# Altium PCB PCB1.pcbdoc (part 3 of 3)
Units mil, origin at the board's own origin, x right, y up, seen from the top; angles counter-clockwise.
Board outline 3947.03 x 3946.03 mil, 2 copper layers (Top Layer, Bottom Layer); 96 components, 119 nets, 489 pads, 175 vias.
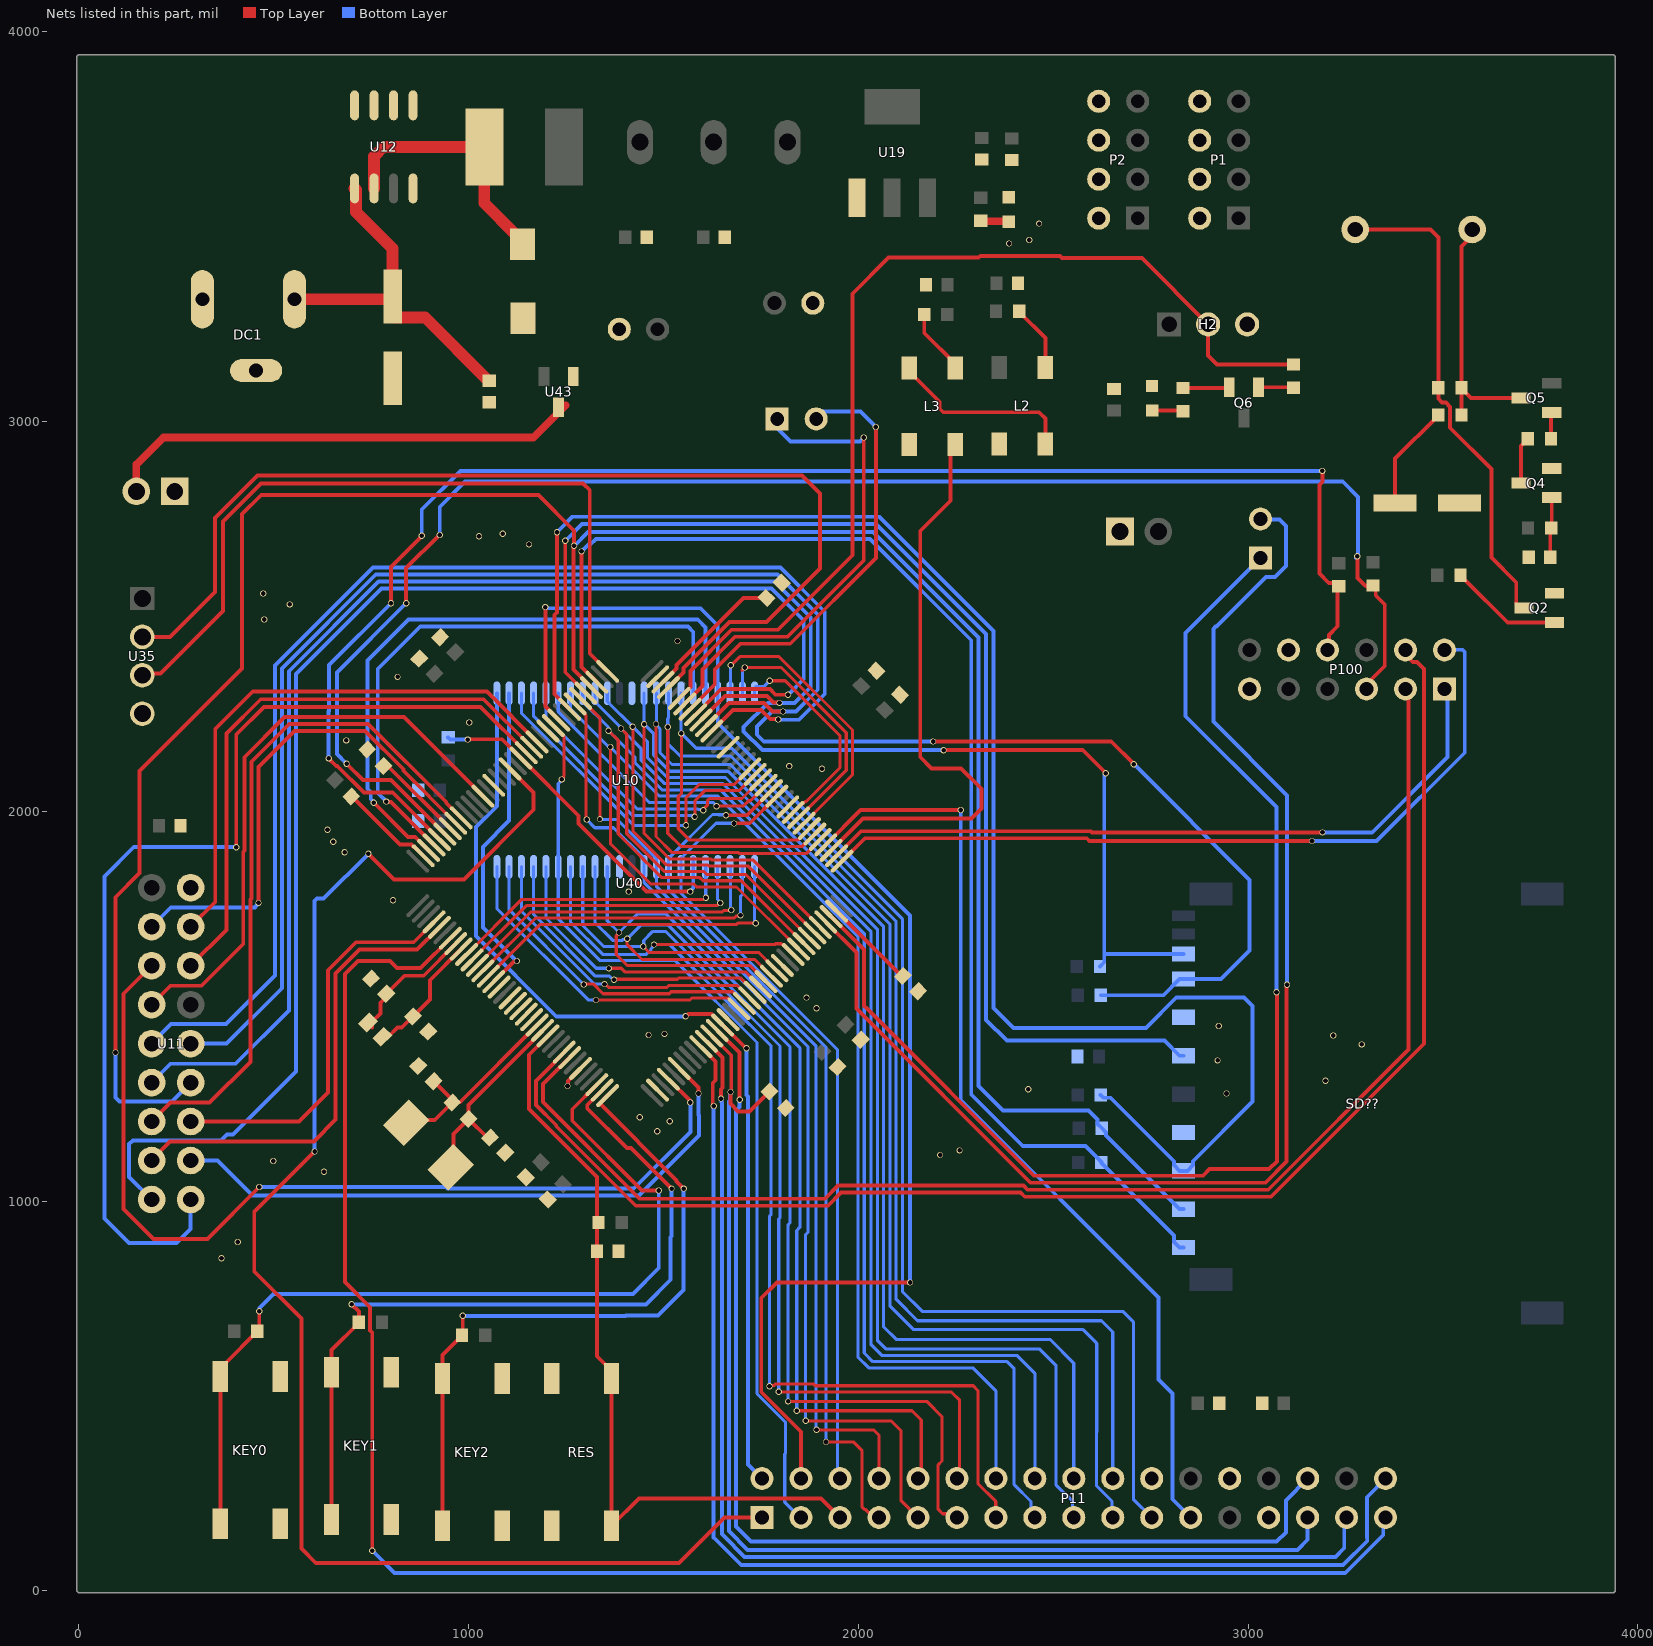
[diagram p2: the nets of this part, all layers, seen from the top]

## Via types
v1: diameter 16, hole 12, Top Layer to Bottom Layer, 175 vias

## Nets (pads, with @x,y where several pads share a name; then routed paths per layer and width w, separated by ;. In a path a pad name is that pad's centre, name@x,y a point inside that pad or via, vN(x,y) a via of type N, cw(c..) or ccw(c..) an arc to the next point about the centre after c; other vN are vias at no path point) (continued)
DCMI_D1: U11.9 U40.97 | length 3307.2
  Top Layer w10: U40.97@1624.19,2206.14 1678.05,2260 1750.8,2260 1774.12,2236.68 1793.32,2236.68 v1(1794.47,2235.53)
  Bottom Layer w10: U11.9@187,1404 237,1454 378,1454 503,1579 503,2374.46 754.54,2626 1800,2626 1914,2512 1914,2301 1848,2235 1795,2235 v1(1794.47,2235.53)
DCMI_D2: R104.1 SD??.7 U11.10 U40.98 | length 5299.4
  Top Layer w10: U40.98@1610.26,2220.06 1668.21,2278 1758.26,2278 1779.73,2256.53 1806.47,2256.53 v1(1807,2256) ; v1(2192,2179) 2649,2179 v1(2707,2121)
  Bottom Layer w10: U11.10@287,1404 379,1404 521,1546 521,2367 762,2608 1792.54,2608 1896,2504.54 1896,2311.97 1840.03,2256 v1(1807,2256) 1806.47,2256.53 1778.53,2256.53 1740,2218 1740,2196.46 1757.46,2179 v1(2192,2179) ; R104.1@2622.32,1528 2783.03,1528 2824.72,1569.69 SD??.7@2834.57,1569.69 2930.69,1569.69 3004,1643 3004,1824 v1(2707,2121)
DCMI_D3: R103.1 SD??.8 U11.11 U40.99 | length 5090.2
  Top Layer w10: U40.99@1596.35,2233.97 1658.37,2296 1765.71,2296 1782.35,2279.36 1796.76,2279.36 v1(1797.91,2278.21) ; v1(2219,2157) 2576,2157 v1(2635,2098)
  Bottom Layer w10: U11.11@187,1304 235.43,1352.43 402.43,1352.43 539,1489 539,2359.54 769.46,2590 1785.09,2590 1878,2497.09 1878,2319.42 1836.79,2278.21 v1(1797.91,2278.21) 1768.21,2278.21 1706,2216 1706,2205 1754,2157 v1(2219,2157) ; R103.1@2620.32,1602 2631.2,1612.88 2631.2,1631 ; v1(2635,2098) 2635,2096.38 2631.2,2092.57 2631.2,1631 ; SD??.8@2834.57,1633.86 2634.06,1633.86 2631.2,1631
DCMI_D4: R105.1 SD??.1 U11.12 U40.112 | length 6166.3
  Top Layer w10: v1(94,1381.15) 94,1779.49 156,1841.49 156,2104 419,2367 419,2763 468,2812 1179,2812 1271,2720 v1@1271,2681 ; v1(1270.68,2681.24) 1269.53,2680.09 1269.53,2676.23 1269,2675.7 1269,2363.66 U40.112@1315.17,2317.49
  Bottom Layer w10: v1(94,1381.15) 94,1266 104.43,1255.57 238.57,1255.57 U11.12@287,1304 ; v1(1270.68,2681.24) 1271.24,2681.24 1307,2717 2037.46,2717 2308,2446.46 2308,1295 2371,1232 2591.14,1232 2597,1226.14 2613.78,1209.36 2613.78,1197.88 R105.1@2624.66,1187 2635.54,1176.12 2635.54,1168.32 2824.72,979.13 SD??.1@2834.57,979.13
DCMI_D5: U11.13 U40.136 | length 1766.6
  Top Layer w10: U11.13@187,1204 235.43,1252.43 335.43,1252.43 440,1357 440,1773.74 443,1776.74 443,2127.11 539.89,2224 742.17,2224 942.66,2023.51 942.66,2021.87 U40.136@981.1,1983.43
DCMI_D6: U11.14 U40.4 | length 1020.6
  Top Layer w10: U11.14@287,1204 565,1204 639.2,1278.2 639.2,1592.2 711,1664 859.34,1664 U40.4@911.51,1716.17
DCMI_D7: U11.15 U40.5 | length 1207.1
  Top Layer w10: U11.15@187,1104 187,1106 234,1153 603,1153 659,1209 659,1584 720,1645 868.17,1645 U40.5@925.42,1702.25
DCMI_HREF: U11.5 U40.40 | length 2415.2
  Top Layer w10: U11.5@187,1604 115,1532 115,979.98 191.98,903 330,903 v1(463,1036) ; U40.40@1512.83,1312.51 1569,1256.34 v1(1569,1252.67)
  Bottom Layer w10: v1(463,1036) 942.26,1036 946.26,1032 1423.89,1032 1569,1177.11 v1(1569,1252.67)
DCMI_PCLK: U11.16 U40.42 | length 1598.3
  Top Layer w10: U40.42@1540.67,1340.35 1590,1291.02 v1(1590,1276)
  Bottom Layer w10: U11.16@287,1104 356,1104 446,1014 1437,1014 1591,1168 1591,1219.61 1590,1220.61 v1(1590,1276)
DCMI_PWDN: U11.18 U40.124 | length 2696.4
  Top Layer w10: v1(404,1908) 404,2197.15 474.85,2268 1030.59,2268 U40.124@1148.13,2150.46
  Bottom Layer w10: U11.18@287,1004 287,928 251,892 129,892 66,955 66,1833 141,1908 v1(404,1908)
DCMI_RESET: U11.7 U40.132 | length 1518.2
  Top Layer w10: U11.7@187,1504 235.43,1552.43 314.43,1552.43 422,1660 422,1896.3 425,1899.3 425,2138.81 528.19,2242 833.88,2242 U40.132@1036.78,2039.1
DCMI_SCL: U11.4 U40.122 | length 1452.5
  Top Layer w10: U11.4@287,1704 350,1767 350,2211 446.37,2307.37 1046.9,2307.37 U40.122@1175.97,2178.3
DCMI_SDA: U11.6 U40.123 | length 1504.6
  Top Layer w10: U11.6@287,1604 379,1696 379,2200 466.69,2287.69 1038.75,2287.69 U40.123@1162.06,2164.38
DCMI_VSYNC: U11.3 U40.137 | length 1294.6
  Top Layer w10: v1(461,1765.04) 461,2114 553,2206 734.71,2206 832.63,2108.08 832.63,2104.06 U40.137@967.19,1969.51
  Bottom Layer w10: U11.3@187,1704 236,1753 452,1753 452,1754.42 461,1763.42 v1(461,1765.04)
DCMI_XCLK: U11.17 U40.100 | length 3597.5
  Top Layer w10: U40.100@1582.43,2247.9 1648.53,2314 1773.17,2314 1787.96,2299.21 v1(1819.84,2299.21)
  Bottom Layer w10: U11.17@187,1004 129,1062 129,1146 138.57,1155.57 364.57,1155.57 380,1171 396,1171 406,1181 557,1332 557,2352.09 776.91,2572 1777.63,2572 1860,2489.63 1860,2339.1 1821.93,2301.04 1821.66,2301.04 v1(1819.84,2299.21)
FSMC_A0: U10.5 U40.10 | length 754.3
  Top Layer w8: U40.10@995.03,1632.65 1136.37,1774 1602.84,1774 1606.84,1778 v1(1609,1778)
  Bottom Layer w8: U10.5@1607.98,1857.68 1608.49,1857.17 1608.49,1778.51 v1(1609,1778)
FSMC_A1: U10.4 U40.11 | length 793.2
  Top Layer w8: U40.11@1008.94,1618.74 1148.21,1758 1637.31,1758 1644.31,1765 v1(1646,1765)
  Bottom Layer w8: U10.4@1639.48,1857.68 1639.24,1857.44 1639.24,1773.92 1646,1767.16 v1(1646,1765)
FSMC_A2: U10.3 U40.12 | length 822
  Top Layer w8: U40.12@1022.86,1604.81 1160.05,1742 1651.28,1742 1654.75,1745.47 1672.47,1745.47 v1(1674,1747)
  Bottom Layer w8: U10.3@1670.98,1857.68 1672.49,1856.17 1672.49,1748.51 v1(1674,1747)
FSMC_A3: U10.2 U40.13 | length 846.6
  Top Layer w8: U40.13@1036.78,1590.9 1171.88,1726 1681.28,1726 1686.75,1731.47 1696.47,1731.47 v1(1698,1733)
  Bottom Layer w8: v1(1698,1733) 1698,1782 1702.47,1786.47 U10.2@1702.47,1857.68
FSMC_A4: U10.1 U40.14 | length 888.6
  Top Layer w8: U40.14@1050.7,1576.97 1183.73,1710 1687.91,1710 1690.91,1713 v1(1737,1713)
  Bottom Layer w8: U10.1@1733.97,1857.68 1733.97,1718.19 1737,1715.16 v1(1737,1713)
FSMC_A5: U10.24 U40.15 | length 832.7
  Top Layer w10: U40.15@1064.62,1563.06 1116.41,1614.85 1122.85,1614.85 v1(1124,1616)
  Bottom Layer w10: U10.24@1104.05,2303 1104.05,1976.05 1037,1909 1037,1702 1123,1616 v1(1124,1616)
FSMC_A6: P11.2 U10.23 U40.50 | length 2584.3
  Top Layer w10: v1(1557,1474) 1558.62,1474 1564.86,1480.23 1623.22,1480.23 1651.75,1451.7 U40.50@1652.03,1451.7 1711.66,1392.07 v1(1713.1,1392.07)
  Bottom Layer w10: U10.23@1072.55,2303 1072.55,2012.93 1019,1959.38 1019,1680 1225,1474 v1(1557,1474) ; v1(1713.1,1392.07) 1713.1,1272.6 1717,1268.7 1717,324 P11.2@1753,288
FSMC_A7: U10.22 U40.53 | length 838.9
  Top Layer w8: v1(1327,1516) 1568.16,1516 1573.16,1520.99 1665.43,1520.99 1692.96,1493.46 U40.53@1693.78,1493.46
  Bottom Layer w8: U10.22@1072.55,1857.68 1072.55,1750.63 1307,1516.18 1326.82,1516.18 v1(1327,1516)
FSMC_A8: U10.21 U40.54 | length 818.9
  Top Layer w8: v1(1295.76,1555.7) 1297.3,1557.23 1311.64,1557.23 1311.76,1557.35 1319.76,1557.35 1345.12,1532 1515.18,1532 1520.18,1536.99 1677.27,1536.99 1706.89,1507.38 U40.54@1707.7,1507.38
  Bottom Layer w8: U10.21@1104.05,1857.68 1104.05,1747.41 v1(1295.76,1555.7)
FSMC_A9: U10.20 U40.55 | length 796
  Top Layer w8: v1(1348.7,1556.7) 1350.87,1556.7 1359.57,1548 1508.56,1548 1513.55,1552.99 1689.1,1552.99 1720.8,1521.3 U40.55@1721.62,1521.3
  Bottom Layer w8: U10.20@1135.54,1857.68 1135.54,1744.21 1323.04,1556.7 v1(1348.7,1556.7)
FSMC_A10: U10.19 U40.56 | length 777.1
  Top Layer w8: v1(1373,1568) 1373.99,1568.99 1535.96,1568.99 1538.96,1572 1698.76,1572 U40.56@1735.54,1535.22
  Bottom Layer w8: U10.19@1167.04,1857.68 1167.04,1735.33 1325.37,1577 1361.84,1577 1370.84,1568 v1(1373,1568)
FSMC_A11: U10.18 U40.57 | length 755.9
  Top Layer w8: v1(1360.05,1597) 1360.44,1597.38 1391.68,1597.38 1401.06,1588 1710.59,1588 U40.57@1749.46,1549.13
  Bottom Layer w8: U10.18@1198.54,1857.68 1198.54,1726.46 1327.62,1597.38 1359.67,1597.38 v1(1360.05,1597)
FSMC_A12: U10.28 U40.87 | length 704.1
  Top Layer w8: v1(1636,2013) 1637.15,2014.15 1705.64,2014.15 1718.61,2027.13 1723.57,2027.13 U40.87@1763.38,2066.94
  Bottom Layer w8: U10.28@1230.03,2303 1230.03,2255.97 1463,2023 1627.31,2023 1636,2014.31 v1(1636,2013)
FSMC_A13: U10.27 U40.88 | length 752.2
  Top Layer w8: v1(1602,2003) 1602,2005.16 1613.46,2016.62 1613.46,2028.31 1618.14,2032.99 1627.71,2032.99 1701.59,2033 U40.88@1749.46,2080.87
  Bottom Layer w8: U10.27@1198.54,2303 1198.54,2240.46 1433,2006 1588.28,2006 1589.75,2004.53 1600.47,2004.53 v1(1602,2003)
FSMC_A14: U10.26 U40.89 | length 803.4
  Top Layer w8: v1(1580,1986) 1581,1987 1581,2027.55 1606.45,2053 1693.76,2053 U40.89@1735.54,2094.78
  Bottom Layer w8: U10.26@1167.04,2303 1167.04,2243.59 1421.63,1989 1572.08,1989 1573.55,1987.53 1578.47,1987.53 v1(1580,1986)
FSMC_A15: U10.25 U40.90 | length 857.6
  Top Layer w8: v1(1558,1964) 1558,2035 1592,2069 1681.92,2069 U40.90@1721.62,2108.7
  Bottom Layer w8: U10.25@1135.54,2303 1135.54,2252.46 1424,1964 v1(1558,1964)
FSMC_A16: U10.42 U40.80 | length 762.5
  Top Layer w8: v1(1673,2375) 1674.04,2375 1696.04,2397 1796.63,2397 1985,2208.63 1985,2093.7 U40.80@1860.81,1969.51
  Bottom Layer w8: U10.42@1670.98,2303 1671.99,2304.01 1671.99,2373.99 v1(1673,2375)
FSMC_A17: U10.43 U40.81 | length 676.9
  Top Layer w8: 1702,2362 v1(1709,2369) 1802,2369 1969,2202 1969,2105.53 U40.81@1846.9,1983.43
  Bottom Layer w8: U10.43@1702.47,2303 1702.47,2360.31 1709,2366.84 v1(1709,2369)
FSMC_A18: U10.44 U40.82 | length 548.1
  Top Layer w8: v1(1773,2335) 1812.33,2335 1953,2194.33 1953,2112.16 1865.72,2024.88 1863.59,2024.88 1860.57,2021.87 1857.49,2021.87 U40.82@1832.97,1997.35
  Bottom Layer w8: U10.44@1733.97,2303 1733.97,2316.26 1738.42,2320.71 1758.71,2320.71 v1(1773,2335)
FSMC_D0: P11.6 U10.7 U40.85 | length 2070.6
  Top Layer w10: v1(1681,1969) 1681.35,1969.35 1721.46,1969.35 U40.85@1791.22,2039.1
  Bottom Layer w8: v1(1681,1969) 1680.65,1969.35 1634.94,1969.35 1544.99,1879.39 U10.7@1544.99,1857.68 1544.99,1789.73 1947,1387.72 P11.6@1947,288
FSMC_D1: P11.7 U10.8 U40.86 | length 2303.1
  Top Layer w8: v1(1917,382) 1987,382 2010,359 2010,214.69 2015.66,209.03 2018.16,209.03 2039.18,188 P11.7@2053,188
  Top Layer w10: v1(1660.66,1989.66) 1661,1990 1714.27,1990 U40.86@1777.3,2053.03
  Bottom Layer w8: v1(1660.66,1989.66) 1659.13,1991.19 1641.64,1991.19 1640.84,1992 1626.11,1992 1513.5,1879.39 U10.8@1513.5,1857.68 1513.5,1798.59 1917,1395.09 v1(1917,382)
FSMC_D2: P11.8 U10.9 U40.114 | length 2428.6
  Top Layer w8: U40.114@1287.33,2289.65 1337,2239.98 v1(1337,1980) ; v1(1893,413) 2039,413 2053,399 P11.8@2053,288
  Bottom Layer w8: v1@1338.09,1979 1382,1979 1482,1879 U10.9@1482,1857.68 1482,1807.46 1892,1397.46 1892,414 v1(1893,413)
FSMC_D3: P11.9 U10.10 U40.115 | length 2613.3
  Top Layer w8: U40.115@1273.41,2275.74 1273.41,2274.92 1301,2247.33 1301,1981 v1(1303,1979) ; v1(1865,436) 2084,436 2110,410 2110,231 P11.9@2153,188
  Bottom Layer w8: v1(1303,1979) 1324,1958 1371.89,1958 1450.5,1879.39 U10.10@1450.5,1857.68 1450.5,1816.33 1870.85,1395.98 1870.85,920 1865,914.15 v1(1865,436)
FSMC_D4: P11.10 U10.13 U40.58 | length 2697.6
  Top Layer w8: v1(1386,1689) 1386,1687.31 1379,1680.31 1379,1632.69 1407.69,1604 1722.44,1604 U40.58@1763.38,1563.06 ; v1(1842,462) 2138,462 2161.69,438.31 2161.69,296.69 P11.10@2153,288
  Bottom Layer w8: U10.13@1356.02,1857.68 1356.02,1718.98 v1(1386,1689) 1434,1737 1506,1737 1850,1393 1850,932.58 1842,924.58 v1(1842,462)
FSMC_D5: P11.11 U10.14 U40.59 | length 2848.2
  Top Layer w8: v1(1407,1673) 1407,1658 1445,1620 1734.27,1620 U40.59@1777.3,1576.97 ; v1(1820,486) 2176,486 2215,447 2215,333 2205,323 2205,209 2216.23,197.77 2243.23,197.77 P11.11@2253,188
  Bottom Layer w8: U10.14@1324.52,1857.68 1324.52,1714.48 1370,1669 1394.28,1669 1396.75,1671.47 1405.47,1671.47 v1(1407,1673) 1442,1708 1512.37,1708 1824.64,1395.73 1824.64,944.27 1820,939.63 v1(1820,486)
FSMC_D6: P11.12 U10.15 U40.60 | length 2759.5
  Top Layer w8: v1(1448,1653) 1463,1638 1744.12,1638 U40.60@1791.22,1590.9 ; v1(1796,511) 1797,510 2239,510 2260,489 2260,295 P11.12@2253,288
  Bottom Layer w8: U10.15@1293.02,1857.68 1293.02,1706.98 1347,1653 v1(1448,1653) 1449.53,1654.53 1449.53,1668.53 1473,1692 1505.25,1692 1685,1512.25 1685,1512 1799,1398 1799,957.08 1796,954.08 v1(1796,511)
FSMC_D7: P11.13 U10.16 U40.63 | length 2945.7
  Top Layer w8: v1(1476,1658) 1785.68,1658 1787.86,1660.19 1802.37,1660.19 1804.46,1658.1 1806.7,1658.1 1832.16,1632.65 U40.63@1832.97,1632.65 ; v1(1772,525) 1773.53,526.53 1783.25,526.53 1787.72,531 1884.8,531 1889.8,526 2295,526 2307,514 2307,275.27 2352.74,229.53 2352.74,188.26 P11.13@2353,188
  Bottom Layer w8: U10.16@1261.53,1857.68 1261.53,1715.84 1344.37,1633 1456.28,1633 1468,1644.72 1468,1647.84 1476,1655.84 v1(1476,1658) 1516.63,1658 1669,1505.63 1669,1505.37 1776,1398.37 1776,964.77 1772,960.77 v1(1772,525)
FSMC_D8: P11.14 U10.29 U40.64 | length 3556.4
  Top Layer w8: v1(1364,2165) 1364,1917.2 1370,1911.2 1370,1911 1467,1814 1577.28,1814 1585.28,1806 1687.47,1806 U40.64@1846.9,1646.57
  Bottom Layer w8: U10.29@1261.53,2303 1261.53,2263.47 1358.47,2166.53 1362.47,2166.53 v1(1364,2165) 1411.26,2117.74 1411.26,2117.6 1489.86,2039 1639.61,2039 1999.06,1679.55 1999.06,600 2027.06,572 2294,572 2353,513 P11.14@2353,288
FSMC_D9: P11.15 U10.30 U40.65 | length 3752.2
  Top Layer w8: v1@1360,2205 1361,2205 1384,2182 1384,1941.75 1495.75,1830 1593.52,1830 1601.52,1822 1699.3,1822 U40.65@1860.81,1660.49
  Bottom Layer w8: U10.30@1293.02,2303 1293.02,2281.29 1359,2215.31 v1(1359,2207) 1427.26,2138.74 1427.26,2124.23 1496.49,2055 1646.24,2055 2015.32,1685.91 2015.32,610 2037.32,588 2382,588 2400,570 2400,272.41 2443.23,229.18 2443.23,197.77 P11.15@2453,188
FSMC_D10: P11.16 U10.31 U40.66 | length 3629.4
  Top Layer w8: v1(1391,2212.4) 1406,2197.4 1406,1942.37 1502.37,1846 1602.76,1846 1610.76,1838 1711.15,1838 U40.66@1874.74,1674.41
  Bottom Layer w8: U10.31@1324.52,2303 1324.52,2281.29 1391,2214.81 v1(1391,2212.4) 1443.26,2160.14 1443.26,2130.86 1503.12,2071 1652.86,2071 2033,1690.86 2033,631 2060,604 2407,604 2453,558 P11.16@2453,288
FSMC_D11: P11.17 U10.32 U40.67 | length 3772.4
  Top Layer w8: v1(1421,2217) 1422,2216 1422,1949 1509,1862 1614.6,1862 1617.18,1859.42 1717.56,1859.42 U40.67@1888.65,1688.33
  Bottom Layer w8: U10.32@1356.02,2303 1356.02,2281.98 v1(1421,2217) 1459.26,2178.74 1459.26,2137.48 1509.75,2087 1659.49,2087 2049,1697.49 2049,643 2072,620 2466,620 2507,579 2507,272.41 2549.88,229.53 2549.88,191.12 P11.17@2553,188
FSMC_D12: P11.18 U10.35 U40.68 | length 3623
  Top Layer w8: v1(1450.5,2223.5) 1450.5,1943.13 1515.63,1878 1621.23,1878 1623.8,1875.42 1729.4,1875.42 U40.68@1902.58,1702.25
  Bottom Layer w8: U10.35@1450.5,2303 v1(1450.5,2223.5) 1475.26,2198.74 1475.26,2144.11 1516.37,2103 1666.12,2103 2065,1704.12 2065,677 2097,645 2492,645 2553,584 P11.18@2553,288
FSMC_D13: P11.19 U10.36 U40.77 | length 3687.4
  Top Layer w8: v1(1481,2224) 1481,1935.25 1522.25,1894 1692.97,1894 1695.54,1891.42 1866.25,1891.42 U40.77@1902.58,1927.75
  Bottom Layer w8: U10.36@1482,2303 1482,2225 v1(1481,2224) 1481,2221.84 1491.26,2211.57 1491.26,2150.74 1522,2120 1671.75,2120 2081,1710.75 2081,731 2142,670 2577,670 2612,635 2612,407.22 2611.47,406.69 2611.47,268.91 2650.85,229.53 2650.85,190.15 P11.19@2653,188
FSMC_D14: P11.20 U10.37 U40.78 | length 3518.2
  Top Layer w8: v1(1511.26,2216.3) 1511.25,1943.75 1545,1910 1856.16,1910 1887.83,1941.67 U40.78@1888.65,1941.67
  Bottom Layer w8: U10.37@1513.5,2303 1513.5,2240.3 1511.26,2238.06 v1(1511.26,2216.3) 1511.26,2173.74 1543,2142 1672.37,2142 2097,1717.37 2097,748 2152,693 2624,693 2653,664 P11.20@2653,288
FSMC_D15: P11.21 U10.38 U40.79 | length 3579.3
  Top Layer w8: v1(1546,2200) 1546,2045.63 1538,2037.63 1538,1955.72 1567.72,1926 1844.33,1926 1873.92,1955.59 U40.79@1874.74,1955.59
  Bottom Layer w8: U10.38@1544.99,2303 1545.49,2302.49 1545.49,2200.51 v1(1546,2200) 1584,2162 1675,2162 2113,1724 2113,768 2164,717 2679,717 2706,690 2706,235 P11.21@2753,188
FSMC_NBL0: U10.39 U40.141 | length 1535.4
  Top Layer w10: v1(789,2025) 790.15,2023.85 801.49,2023.85 U40.141@911.51,1913.83
  Bottom Layer w10: v1(789,2025) 767,2047 767,2365 876,2474 1563,2474 1576.49,2460.51 U10.39@1576.49,2303
FSMC_NBL1: U10.40 U40.142 | length 1650.6
  Top Layer w10: v1(757,2022) 845.12,1933.88 863.34,1933.88 897.31,1899.91 U40.142@897.59,1899.91
  Bottom Layer w10: v1(757,2022) 757,2023.62 749,2031.62 749,2050 741,2058 741,2387 846,2492 1588,2492 1607.98,2472.02 U10.40@1607.98,2303
FSMC_NE3: R100.2 U10.6 U40.125 | length 892.3
  Top Layer w10: v1@999,2181 1003,2185 1085.76,2185 U40.125@1134.22,2136.54 1282,1988.76 1282,1969 1457,1794 v1(1569,1794)
  Bottom Layer w10: R100.2@946.87,2189.66 R100.2@948,2189.66 953.66,2184 v1(997.9,2184) v1@1002,2184 ; v1(1569,1794) 1569,1795.62 1576.49,1803.11 U10.6@1576.49,1857.68 U10.6@1576.49,1880.49
FSMC_NE4: P11.1 U40.127 | length 3870.4
  Top Layer w10: v1(605,1127) 450,972 450,820 571,699 571,108 608,71 1540,71 1657,188 P11.1@1753,188 ; v1(743,1891) 809,1825 988,1825 1167,2004 1167,2048.08 U40.127@1106.38,2108.7
  Bottom Layer w10: v1@603,1123 605,1125 v1(605,1127) 605,1770.14 610.86,1776 628,1776 v1(743,1891)
FSMC_NOE: P11.4 U10.41 U40.118 | length 3561.3
  Top Layer w10: v1(1197,2524) 1197,2268.63 U40.118@1231.65,2233.97 ; P11.4@1853,288 1853,408 1751,510 1751,751 1791,791 v1(2133,791)
  Bottom Layer w10: v1@1196,2524 1199,2521 1595,2521 1639.48,2476.52 U10.41@1639.48,2303 1639.48,2226.52 2133,1733 v1(2133,791)
FSMC_NWE: P11.3 U10.17 U40.119 | length 2422.9
  Top Layer w8: U40.119@1217.74,2220.06 1217.74,2219.24 1245.27,2191.71 1245.27,2090.43 1239,2084.16 v1(1239,2082)
  Bottom Layer w8: v1(1239,2082) 1239,2079.84 1230.03,2070.87 U10.17@1230.03,1857.68 1230.03,1724.72 1337.75,1617 1530,1617 1740,1407 1740,506 1813,433 1813,352.66 1811.47,351.14 1811.47,227.53 1851,188 P11.3@1853,188
GND: C1.1 C2.1 C13.1 C17.2 C21.1 C23.1 C25.1 C26.1 C27.1 C29.2 C30.2 C31.2 C37.2 C38.2 C39.2 C40.2 C41.2 C100.1 C101.1 C102.1 C103.1 C106.2 C107.2 D3.2 DC1.2 DC1.3 GSM.1 H2.3 KEY0.1 KEY0.2 KEY1.1 KEY1.2 KEY2.1 KEY2.2 L2.3 L3.3 LED1.1 LED2.1 P1.2 P1.4 P1.6 P1.8 P2.2 P2.4 P2.6 P2.8 P11.22 P11.26 P11.27 P100.10 P100.11 Q2.2 Q4.2 R13.2 R14.2 RES.3 RES.4 SD??.3 SD??.6 U10.12 U10.34 U11.2 U12.4 U12.5 U12.6 U12.7 U12.8 U19.1 U20.2 U21.2 U27.2 U28.2 U29.2 U35.4 U36.2 U37.2 U38.1 U39.1 U40.16 U40.31 U40.38 U40.51 U40.61 U40.83 U40.94 U40.107 U40.120 U40.130 U42.1 U43.1 U44.2 VBUS.1 | length 59
  Top Layer w10: v1(1254,1295.15) 1255.15,1296.3 1255.15,1307.89 1287.33,1340.07 U40.31@1287.33,1340.35
  other v1: 366,853 408,895 629,1075 499,1103 2210,1118 2260,1130 1484,1179 1516,1205 1439,1215 2945,1276 2436,1287 3199,1309 2922,1361 3292,1402 3219,1425 1462,1426 1503,1429 2925,1449 1893,1495 1867,1522 806,1772 1411,1794 682,1895 653,1922 638,1953 1907,2109 1823,2116 686,2182 1002,2228 818,2345 1536,2437 476,2492 541,2531 473,2559 1155,2685 1027,2706 1088,2712 2387,3457 2439,3466 2464,3508
IIC_SCL: P100.5 R110.1 U40.139 | length 4065.2
  Top Layer w10: v1(687.07,2122.07) 729.14,2079.99 801.02,2079.99 U40.139@939.35,1941.67 ; v1(840,2534) 840,2624 v1@925,2709 ; v1(3280.48,2654.77) 3280.48,2598.99 3300.13,2579.34 3302.66,2579.34 ; P100.5@3306,2328 3351,2373 3351,2531 3327.68,2554.32 3327.68,2568.46 3325.41,2570.74 3311.26,2570.74 3302.66,2579.34 ; R110.1@3321,2579.34 3302.66,2579.34
  Bottom Layer w10: v1(687.07,2122.07) 662.08,2147.05 662.08,2356.08 v1(840,2534) ; v1(926,2709) 926,2781 991,2846 3243,2846 3282,2807 v1@3282,2655 ; v1@3277,2650 3280.48,2653.48 v1(3280.48,2654.77)
IIC_SDA: P100.8 R111.1 U40.140 | length 3954.8
  Top Layer w10: v1(641,2135.82) 660.59,2116.23 663.21,2116.23 731.44,2048 805.45,2048 925.42,1928.03 U40.140@925.42,1927.75 ; v1(801,2534) 801,2627 v1@883,2709 ; v1(3190.5,2873.58) 3191,2873.08 3191,2845.58 3183,2837.58 3183,2610 3207.28,2585.72 3220.99,2585.72 3223.76,2582.95 3224.2,2582.95 3234.57,2572.57 3230,2568 3230,2475 3207.67,2452.67 3207.67,2432.67 P100.8@3203,2428
  Bottom Layer w10: v1(641,2135.82) 641,2256.25 641.97,2257.22 641.97,2374.97 v1(801,2534) ; v1(880,2707) 880,2774 979.58,2873.58 v1(3190.5,2873.58)
KEY0: KEY0.3 KEY0.4 R17.1 U40.34 | length 2275.9
  Top Layer w10: KEY0.4@363.22,171.91 KEY0.3@363.22,549.86 377.91,564.55 377.91,585.12 457.66,664.87 R17.1@457.66,666 463,671.34 v1(463,717) ; U40.34@1329.09,1298.59 1266,1235.5 1266,1206 1445,1027 v1(1488,1027)
  Bottom Layer w10: v1(463,717) 464,718 464,726 500,762 1422,762 1488,828 v1(1488,1027)
KEY1: KEY1.3 KEY1.4 R18.1 U40.35 | length 2032.5
  Top Layer w10: KEY1.4@648.45,183.05 KEY1.3@648.45,561 648.45,617.64 718.68,687.87 R18.1@718.68,689 718.68,716.32 v1(700,735) ; U40.35@1343.01,1284.67 1304.56,1246.22 1304.56,1237.94 1406.62,1135.88 1417.12,1135.88 v1(1521,1032)
  Bottom Layer w10: v1(700,735) 1455,735 1518,798 1518,906.69 1521,909.69 v1(1521,1032)
KEY2: KEY2.3 KEY2.4 R19.1 U40.36 | length 1751.9
  Top Layer w10: KEY2.4@933.22,166.91 KEY2.3@933.22,544.86 933.22,604.75 983.34,654.87 R19.1@983.34,656 985,657.66 v1(985,706) ; U40.36@1356.93,1270.75 1336.86,1250.68 1336.86,1250.01 1533.63,1053.23 1533.63,1050.37 v1(1552,1032)
  Bottom Layer w10: v1(985,706) 986,705 1403,705 1404,706 1486,706 1552,772 v1(1552,1032)
LCD_BL: P11.23 U40.76 | length 2443.6
  Top Layer w10: U40.76@1916.49,1913.83 2006.22,2003.56 v1(2263,2003.56)
  Bottom Layer w10: v1(2263,2003.56) 2263,1260 2770,753 2770,542 2806,506 2806,235 P11.23@2853,188
NetBUZZER2_1: BUZZER2.1 Q5.3 R20.2 R21.2 | length 649.4
  Top Layer w10: R21.2@3547.66,3017 3547.66,3085.87 3572.65,3060.87 Q5.3@3700.56,3060.87 ; R20.2@3547.66,3087 3547.66,3449.18 3575.01,3476.53 BUZZER2.1@3575.01,3493
NetBUZZER2_2: BUZZER2.2 Q2.3 R20.1 | length 1275.4
  Top Layer w10: BUZZER2.2@3274.99,3493 3468,3493 3488.34,3472.66 R20.1@3488.34,3087 3488.34,3058.67 3497.98,3049.03 3507.58,3049.03 3518.78,3037.82 3518.78,2984.22 3625,2878 3625,2651 3688.39,2587.61 3688.39,2530.78 3697.17,2522 Q2.3@3708,2522
NetC17_1: C17.1 C21.2 DC1.1 U12.1 | length 932.4
  Top Layer w30: DC1.1@553.2,3314 C17.1@797.89,3314 ; U12.1@707.53,3598.37 711.34,3594.56 711.34,3537.66 805,3444 C17.1@805,3321.11 C17.1@797.89,3314 ; C21.2@1053,3104.56 1051.03,3104.56 888.37,3267.22 813.62,3267.22 797.89,3282.95 C17.1@797.89,3314
NetC29_1: C29.1 U40.71 | length 239.2
  Top Layer w10: U40.71@1944.33,1744.01 2032.61,1655.73 2032.94,1655.73 2111.18,1577.49 C29.1@2114.51,1577.49
NetC30_1: C30.1 U40.106 | length 361.8
  Top Layer w10: U40.106@1498.91,2331.41 1498.91,2331.69 1533.2,2365.98 1533.2,2375.11 1705.6,2547.51 1746.53,2547.51 1747.92,2548.9 1763.12,2548.9 C30.1@1764.51,2547.51
NetC40_1: C40.1 R21.1 | length 272.2
  Top Layer w10: C40.1@3377.32,2790.83 3377.32,2904.85 3488.34,3015.87 R21.1@3488.34,3017
NetD3_1: D3.1 L1.1 U12.2 | length 666
  Top Layer w30: U12.2@757.53,3598.37 757.53,3680.53 781.65,3704.65 L1.1@1040.52,3704.65 1040.52,3560.83 1121.42,3479.93 1121.74,3479.93 1138.63,3463.04 D3.1@1138.63,3454.65
NetL2_1: L2.1 R51.1 | length 171.5
  Top Layer w10: R51.1@2412.66,3283 2412.66,3281.87 2480.05,3214.48 L2.1@2480.05,3139.43
NetL2_4: L2.4 L3.2 | length 484.2
  Top Layer w10: L3.2@2130.9,3138 2130.9,3128.16 2209,3050.06 2209,3033 2218,3024 2464,3024 2480.05,3007.95 L2.4@2480.05,2942.57
NetL3_1: L3.1 R52.1 | length 170
  Top Layer w10: R52.1@2169.34,3275 2169.34,3227.5 2249,3147.84 L3.1@2249,3138
NetLED1_2: LED1.2 R23.1 | length 79.8
  Top Layer w10: LED1.2@2754.14,3028.53 2831.55,3028.53 R23.1@2833.24,3026.84
NetLED2_2: LED2.2 R24.1 | length 72.7
  Top Layer w20: R24.1@2314.55,3515.21 2315.89,3513.87 2384.79,3513.87 LED2.2@2386.14,3512.52
NetQ2_1: Q2.1 U5.1 | length 292.4
  Top Layer w10: U5.1@3545.28,2605.87 3545.28,2604.74 3556.15,2593.87 3557.28,2593.87 3666.55,2484.6 Q2.1@3786.74,2484.6
NetQ4_1: Q4.1 U41.1 U42.2 | length 154.6
  Top Layer w10: U42.2@3775.56,2652 3775.56,2724.9 U41.1@3777.66,2727 3779.3,2728.64 Q4.1@3779.3,2805.01
NetQ4_3: Q4.3 R22.1 | length 120.7
  Top Layer w10: Q4.3@3700.56,2842.41 3700.56,2937.21 3718.09,2954.74 R22.1@3718.09,2955.87
NetQ5_1: Q5.1 R22.2 | length 68.4
  Top Layer w10: R22.2@3777.41,2955.87 3777.41,3021.59 Q5.1@3779.3,3023.47
NetQ6_1: Q6.1 R50.1 | length 90.3
  Top Layer w10: Q6.1@3026.99,3088.04 3116.3,3088.04 R50.1@3117,3087.34
NetQ6_2: Q6.2 R23.2 | length 119.7
  Top Layer w10: R23.2@2833.24,3086.16 2950.31,3086.16 Q6.2@2952.19,3088.04
NetR12_1: R12.1 U40.143 | length 247.7
  Top Layer w10: R12.1@698.97,2038.03 700.97,2038.03 824.48,1914.52 853.47,1914.52 857.87,1910.13 859.53,1910.13 U40.143@883.67,1885.99
NetR13_1: R13.1 U40.138 | length 237.8
  Top Layer w10: R13.1@782.03,2116.25 792.6,2116.25 U40.138@953.26,1955.59
NetU38_2: U38.2 U40.8 X3.1 | length 333
  Top Layer w10: 752.94,1445.32 752.94,1460.52 773.58,1481.16 773.58,1508.9 788.73,1524.06 788.73,1531.73 835.24,1578.24 884.94,1578.24 U40.8@967.19,1660.49
NetU39_2: U39.2 U40.9 X3.2 | length 324.4
  Top Layer w10: X3.2@778.68,1421.58 793.88,1421.58 817.27,1444.96 828.56,1444.96 U39.2@857.32,1473.72 901,1517.4 901,1566.47 U40.9@981.1,1646.57
NetU43_3: U43.3 VBUS.2 | length 1233.1
  Top Layer w20: VBUS.2@147.58,2821 147.58,2889.58 217,2959 1166,2959 1249,3042
OSC_IN: R16.2 U36.1 U40.23 X2.2 | length 510.4
  Top Layer w10: X2.2@840.2,1200.92 847.16,1207.88 913.29,1207.88 R16.2@958.12,1252.71 ; U36.1@910.19,1307.71 965.19,1252.71 965.99,1253.51 977.78,1253.51 U40.23@1175.97,1451.7
OSC_OUT: R16.1 U37.1 U40.24 X2.1 | length 524.5
  Top Layer w10: X2.1@954.35,1086.78 961.31,1093.74 961.31,1172 R16.1@1000.07,1210.76 ; U37.1@1055.07,1162.83 1047.99,1162.83 R16.1@1000.07,1210.76 ; U40.24@1189.9,1437.78 1166.39,1414.28 1166.39,1413.61 1166.88,1413.12 1000.07,1246.3 1000.07,1227.74 1000.87,1226.94 1000.07,1226.14 R16.1@1000.07,1210.76
PF6: U40.18
PF7: U40.19
PF8: U40.20
PF9: U40.21
PF10: U40.22
RESET: C31.1 P11.5 R15.1 RES.1 RES.2 U40.25 | length 2000.2
  Top Layer w10: U40.25@1203.81,1423.86 1155.3,1375.36 1155.3,1236.24 1329.34,1062.2 1329.34,954 1329.52,953.82 C31.1@1329.52,871.13 1329.52,601.8 1366.77,564.55 RES.1@1366.77,544.86 RES.2@1366.77,166.91 1436.87,237 1904,237 P11.5@1953,188
RGB: L3.4 U40.75 | length 1511
  Top Layer w10: U40.75@1930.41,1899.91 2012.5,1982 2291,1982 2316,2007 2316,2058 2264,2110 2188,2110 2158.9,2139.1 2158.9,2718.9 2237,2797 2237,2929.15 L3.4@2249,2941.15
S_DOUT: P100.4 U40.28 | length 3767.4
  Top Layer w10: U40.28@1245.57,1382.1 1221.44,1357.97 1221.44,1356.31 1173.3,1308.18 1173.3,1246.24 1225,1194.54 1225,1192 1429,988 1922.23,988 1955.73,1021.5 2416.59,1021.5 2427.09,1011 3059.37,1011 3452,1403.63 3452,2365 3433.39,2383.61 3422.66,2383.61 3405.35,2400.92 P100.4@3405.35,2411.65
S_LRCK: P100.2 U40.73 | length 2038.3
  Top Layer w10: U40.73@1958.25,1872.07 2017.18,1931 2586.28,1931 2593.28,1924 v1(3164,1924)
  Bottom Layer w10: v1(3164,1924) 3330,1924 3556.27,2150.27 3556.27,2408.87 3550.42,2414.73 3529.55,2414.73 3525.66,2418.61 3505.16,2418.61 P100.2@3501.27,2414.73
S_SCLK: P100.1 U40.74 | length 1871.8
  Top Layer w10: U40.74@1944.33,1885.99 2007.34,1949 2596.86,1949 2599.86,1946 v1(3191,1946)
  Bottom Layer w10: v1(3191,1946) 3318.7,1946 3512,2139.3 P100.1@3512,2336
S_SDIN: P100.3 U40.29 | length 3537.3
  Top Layer w10: U40.29@1259.49,1368.19 1191.3,1300 1191.3,1253.7 1439,1006 1914.77,1006 1948.27,1039.5 2424.04,1039.5 2434.54,1029 3051.91,1029 3412,1389.09 P100.3@3412,2293
SDIO_CMD: R101.1 SD??.2 U40.116 | length 4226.4
  Top Layer w10: v1(1227,2716) 1227,2510.34 1221,2504.34 1221,2300.3 U40.116@1259.49,2261.81
  Bottom Layer w10: v1(1227,2716) 1267,2756 2053.61,2756 2347,2462.61 2347,1495 2398,1444 2738,1444 2816,1522 2990,1522 3012,1500 3012,1254.99 2859.09,1102.09 2859.09,1092.25 2844.41,1077.56 SD??.2@2834.57,1077.56 2824.72,1077.56 2810.04,1092.25 2810.04,1102.09 2647.02,1265.11 2628.89,1265.11 R101.1@2622,1272
SDIO_D2: R102.1 SD??.9 U40.111 | length 3356.5
  Top Layer w10: v1(1290,2667) 1290,2370.78 1329.09,2331.69 U40.111@1329.09,2331.41
  Bottom Layer w10: v1(1290,2667) 1307.3,2684.3 1312.3,2684.3 1327,2699 2030,2699 2290,2439 2290,1273 2422,1141 2582.79,1141 2623.66,1100.13 R102.1@2623.66,1099 2623.66,1097.87 2810.04,911.49 2810.04,895.4 2824.72,880.71 SD??.9@2834.57,880.71
SDIO_SCK: SD??.5 U40.113 | length 3161.7
  Top Layer w10: v1(1248,2694) 1248,2356.83 U40.113@1301.25,2303.58
  Bottom Layer w10: v1(1248,2694) 1291,2737 2045.74,2737 2328,2454.74 2328,1465 2381.5,1411.5 2786.06,1411.5 2824.72,1372.84 SD??.5@2834.57,1372.84
SR501: H2.2 R50.2 U40.103 | length 2626.5
  Top Layer w10: U40.103@1540.67,2289.65 1540.67,2289.93 1569.2,2318.46 1569.2,2360.2 1675,2466 1794,2466 1985,2657 1985,3328 2077.92,3420.92 2308.81,3420.92 2312.89,3425 2517.5,3425 2523.19,3419.31 2727.8,3419.31 H2.2@2897.68,3249.43 2897.68,3169.32 2920.34,3146.66 R50.2@3117,3146.66
SWCLK: U35.3 U40.109 | length 1977.3
  Top Layer w10: U35.3@163,2349.15 167.35,2353.5 209.5,2353.5 370,2514 370,2744 467,2841 1294,2841 1311,2824 1311,2405.18 U40.109@1356.93,2359.25
SWDIO: U35.2 U40.105 | length 2756.5
  Top Layer w10: U35.2@163.01,2447.57 233.57,2447.57 349,2563 349,2752.7 458.3,2862 1856,2862 1902,2816 1902,2623 1765,2486 1669.54,2486 1551.2,2367.66 1551.2,2355.86 U40.105@1512.83,2317.49
T_CS: P11.33 U40.7 | length 4536.7
  Top Layer w10: v1(753,103) 753,662.73 747.56,668.18 747.56,727.44 683,792 683,1582.54 716.46,1616 798,1616 816,1598 876.85,1598 U40.7@953.26,1674.41
  Bottom Layer w10: v1(753,103) 810,46 3249.46,46 3346.93,143.47 3346.93,181.93 P11.33@3353,188
T_MISO: P11.29 R14.1 U40.48 | length 3028.3
  Top Layer w10: U40.48@1624.19,1423.86 1674,1374.05 v1@1674,1277 ; v1(1672,1280) 1672,1249.86 1691.86,1230 1721.05,1230 R14.1@1772.03,1280.97
  Bottom Layer w10: v1(1672,1280) 1670.85,1278.85 1670.85,1258.68 1668,1255.83 1668,153 1716,105 3127,105 3153,131 P11.29@3153,188
T_MOSI: P11.30 U40.49 | length 2899.4
  Top Layer w10: U40.49@1638.1,1437.78 1694.85,1381.03 1694.85,1261.15 v1(1696,1260)
  Bottom Layer w10: v1(1696,1260) 1694.85,1258.85 1694.85,1240.85 1686,1232 1686,164.7 1724.7,126 3073,126 3097,150 3097,232 P11.30@3153,288
T_PEN: P11.31 U40.47 | length 2995.7
  Top Layer w10: U40.47@1610.26,1409.94 1652,1368.21 1652,1290.88 1647.71,1286.59 v1(1647.71,1262.88)
  Bottom Layer w10: v1(1647.71,1262.88) 1648.86,1261.73 1648.86,1253.79 1650,1252.65 1650,145.54 1654,141.54 1708.54,87 3224.09,87 3247,109.91 3247,182 P11.31@3253,188
T_SCK: P11.34 U40.46 | length 3190.9
  Top Layer w10: U40.46@1596.35,1396.03 1634,1358.37 1634,1309.92 1626.71,1302.63 1626.71,1247.87 1629,1245.58 v1(1629,1243.96)
  Bottom Layer w10: v1(1629,1243.96) 1629,136.85 1633,132.85 1699.85,66 3244,66 3305.86,127.86 3305.86,136.14 3305,137 3305,240 P11.34@3353,288
USART1_RX: P13.1 U40.102 | length 1206.4
  Top Layer w10: U40.102@1554.59,2275.74 1600,2321.15 1600,2364 1684,2448 1818,2448 2014,2644 v1(2014,2959)
  Bottom Layer w10: P13.1@1782,2993 1826,2949 2004,2949 v1(2014,2959)
USART1_TX: P13.2 U40.101 | length 1179.9
  Top Layer w10: U40.101@1568.51,2261.81 1631.73,2325.03 1631.73,2364.41 1697.31,2430 1825.46,2430 2045,2649.54 v1(2045,2986)
  Bottom Layer w10: P13.2@1879.51,2989.5 P13.2@1883.01,2993 ; P13.2@1883.01,3025.5 2005.5,3025.5 v1(2045,2986)
USART3_RX: P12.1 U40.70 | length 3243.6
  Top Layer w10: U40.70@1930.41,1730.09 2015,1645.5 2015,1500.86 2020.86,1495 2021,1495 2451,1065 2884.54,1065 2901.54,1082 3054,1082 3074,1102 3074,1535 v1(3073,1536)
  Bottom Layer w10: P12.1@3032,2650 2840,2458 2840,2244 3073,2011 v1(3073,1536)
USART3_TX: P12.2 U40.69 | length 3441.2
  Top Layer w10: U40.69@1916.49,1716.17 1995,1637.66 1995,1494 2442,1047 3044.46,1047 3099,1101.54 3099,1554 v1(3100,1555)
  Bottom Layer w10: P12.2@3032,2750 3033,2749 3081,2749 3098,2732 3098,2630 3069,2601 3046,2601 2919,2474 2916.86,2474 2911,2468.14 2911,2230 3100,2041 v1(3100,1555)
pads on no net: L2.2 P11.32 P100.7 SD??.10 SD??.11 SD??.12 SW??.1 U40.3 U40.26 U40.27 U40.37 U40.41 U40.43 U40.44 U40.45 U40.91 U40.92 U40.93 U40.104 U40.110 U40.117 U40.126 U40.128 U40.129 U40.133 U40.134 U40.135

## Polygon pours and split planes (outlines as drawn)
GND on Bottom Layer "GND_L02_P000" (solid, pour order 0): 16,3640 10,3634 10,296 292,296 314,274 314,43 347,10 3622,10 3638,26 3638,286 3912,286 3916,282 3921,287 3921,3626 3884,3663 3663,3663 3612,3714 3612,3898 3583,3927 319,3927 284,3892 284,3686 247,3649 28,3649
GND on Top Layer "GND_L01_P001" (solid, pour order 1): 25,3649 9,3633 10,3632 10,297 293,297 315,275 315,40 347,8 348,9 3624,9 3640,25 3640,285 3918,285 3923,290 3923,3631 3890,3664 3667,3664 3614,3717 3614,3910 3597,3927 313,3927 280,3894 280,3673 256,3649

## Silkscreen, mask and mechanical layers (free items; w line width, h text height)
Top Silkscreen Layer:
  circle w10: c2335.54,888.16 r108.27
  circle w10: c585.54,888.16 r108.27
  circle w10: c2330.54,2688.16 r108.27
  circle w10: c588.05,2691.97 r108.27
  pour cut-out: 2227.27,888.16 ccw(c2335.54,888.16) 2335.54,779.9 ccw(c2335.54,888.16) 2443.81,888.16 ccw(c2335.54,888.16) 2335.54,996.43 ccw(c2335.54,888.16)
  pour cut-out: 585.54,779.9 cw(c585.54,888.16) 477.28,888.16 cw(c585.54,888.16) 585.54,996.43 cw(c585.54,888.16) 693.81,888.16 cw(c585.54,888.16)
  pour cut-out: 2330.54,2579.9 cw(c2330.54,2688.16) 2222.27,2688.16 cw(c2330.54,2688.16) 2330.54,2796.43 cw(c2330.54,2688.16) 2438.81,2688.16 cw(c2330.54,2688.16)
  pour cut-out: 588.05,2583.7 cw(c588.05,2691.97) 479.79,2691.97 cw(c588.05,2691.97) 588.05,2800.24 cw(c588.05,2691.97) 696.32,2691.97 cw(c588.05,2691.97)
  lines w10: 509.31,810.7 509.31,2770.7 2414.31,2770.7 2414.31,810.7 509.31,810.7
  text "SR501" at 3817.91,3522.09 h39.37 r270
  text "5V" at 2728.06,3386.94 h31.5 r90
  text "3V3" at 2989.06,3374.94 h31.5 r90
  text "GND" at 2627.06,3372.94 h31.5 r90
  text "GND" at 2888.06,3369.94 h31.5 r90
  text "-" at 2990,3163 h30
  text "+5" at 2759,3148 h30
  text "TX1" at 1858,3074 h30
  text "RX1" at 1757,3073 h30
  text "+" at 137,2997.34 h40
  text "-" at 244,2993.01 h40
  text "TX3" at 3131,2725 h30 r90
  text "RX3" at 3128,2599 h30 r90
  text "3V3" at 339,2558 h30
  text "5V" at 2758.17,2511.67 h31.5
  text "GND" at 2619.04,2508.69 h31.5
  text "SWD" at 335,2452 h30
  text "SWCLK" at 332,2342 h30
  text "-" at 341,2227 h30
Mechanical Layer:
  circle w10: c3779.53,157.48 r64.96
Mechanical 6:
  circle w10: c157.48,3779.53 r64.96
  circle w10: c157.48,157.48 r64.96
  circle w10: c3779.53,3779.53 r64.96
  circle w1: c588.05,2691.96 r68.9
  circle w1: c588.05,889.44 r68.9
  circle w1: c2335.57,889.44 r68.9
  circle w1: c2335.57,2691.96 r68.9
  lines w10: 0,1 1,0 3937,0 3937,3936 0,3936 0,1

## Text inside footprints (layer, text, board x,y; h text height)
BUZZER2: Top Silkscreen Layer "+" at 3664.99,3486.49 h32.69 r180
P11: Top Silkscreen Layer "2" at 1633,268 h50; Top Silkscreen Layer "1" at 1633,168 h50; Top Silkscreen Layer "33" at 3413,168 h50; Top Silkscreen Layer "34" at 3413,268 h50
P100: Bottom Silkscreen Layer "2" at 3604,2394 h50; Bottom Silkscreen Layer "1" at 3604,2294 h50; Bottom Silkscreen Layer "1" at 2924,2294 h50; Bottom Silkscreen Layer "1" at 2884,2294 h50; Bottom Silkscreen Layer "12" at 2924,2394 h50
U20: Top Silkscreen Layer "-" at 1874,3347.65 h25.74; Top Silkscreen Layer "+" at 1754,3352.65 h25.74
U21: Top Silkscreen Layer "-" at 1396,3193.35 h25.74 r180; Top Silkscreen Layer "+" at 1516,3188.35 h25.74 r180